# EAGLE board Powerboard (EAGLE 8.6.0)
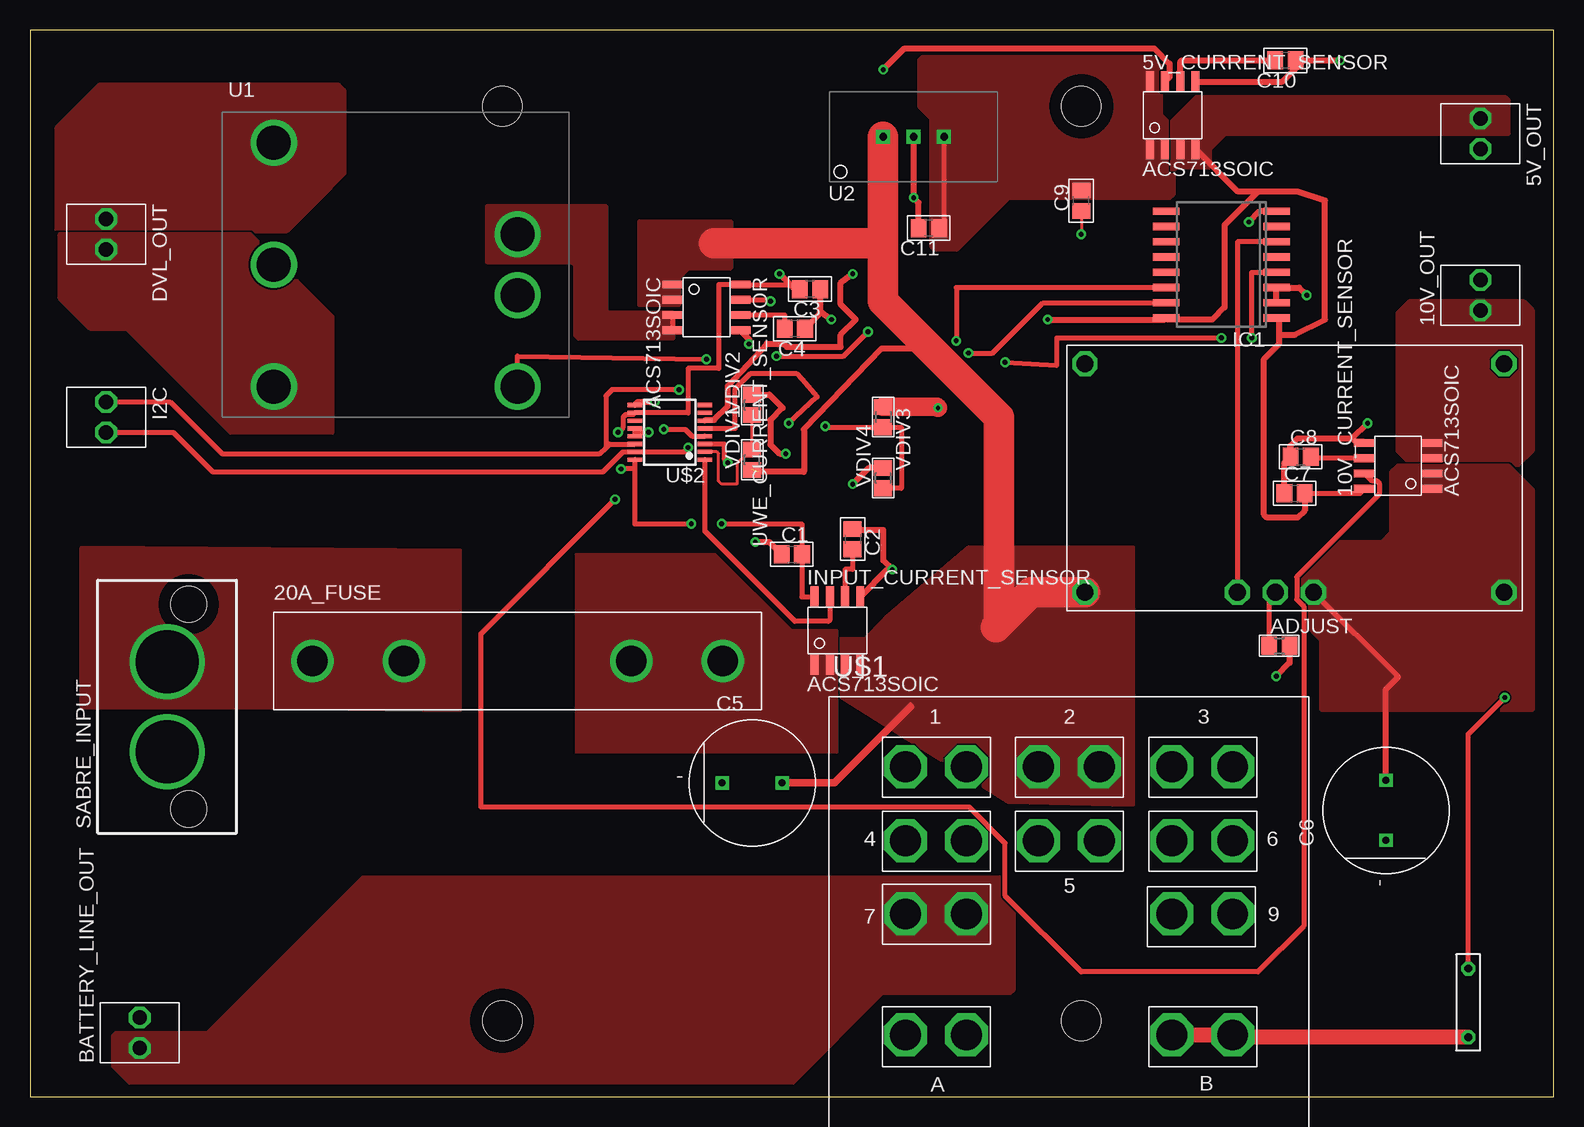
[diagram p0: board, top side]
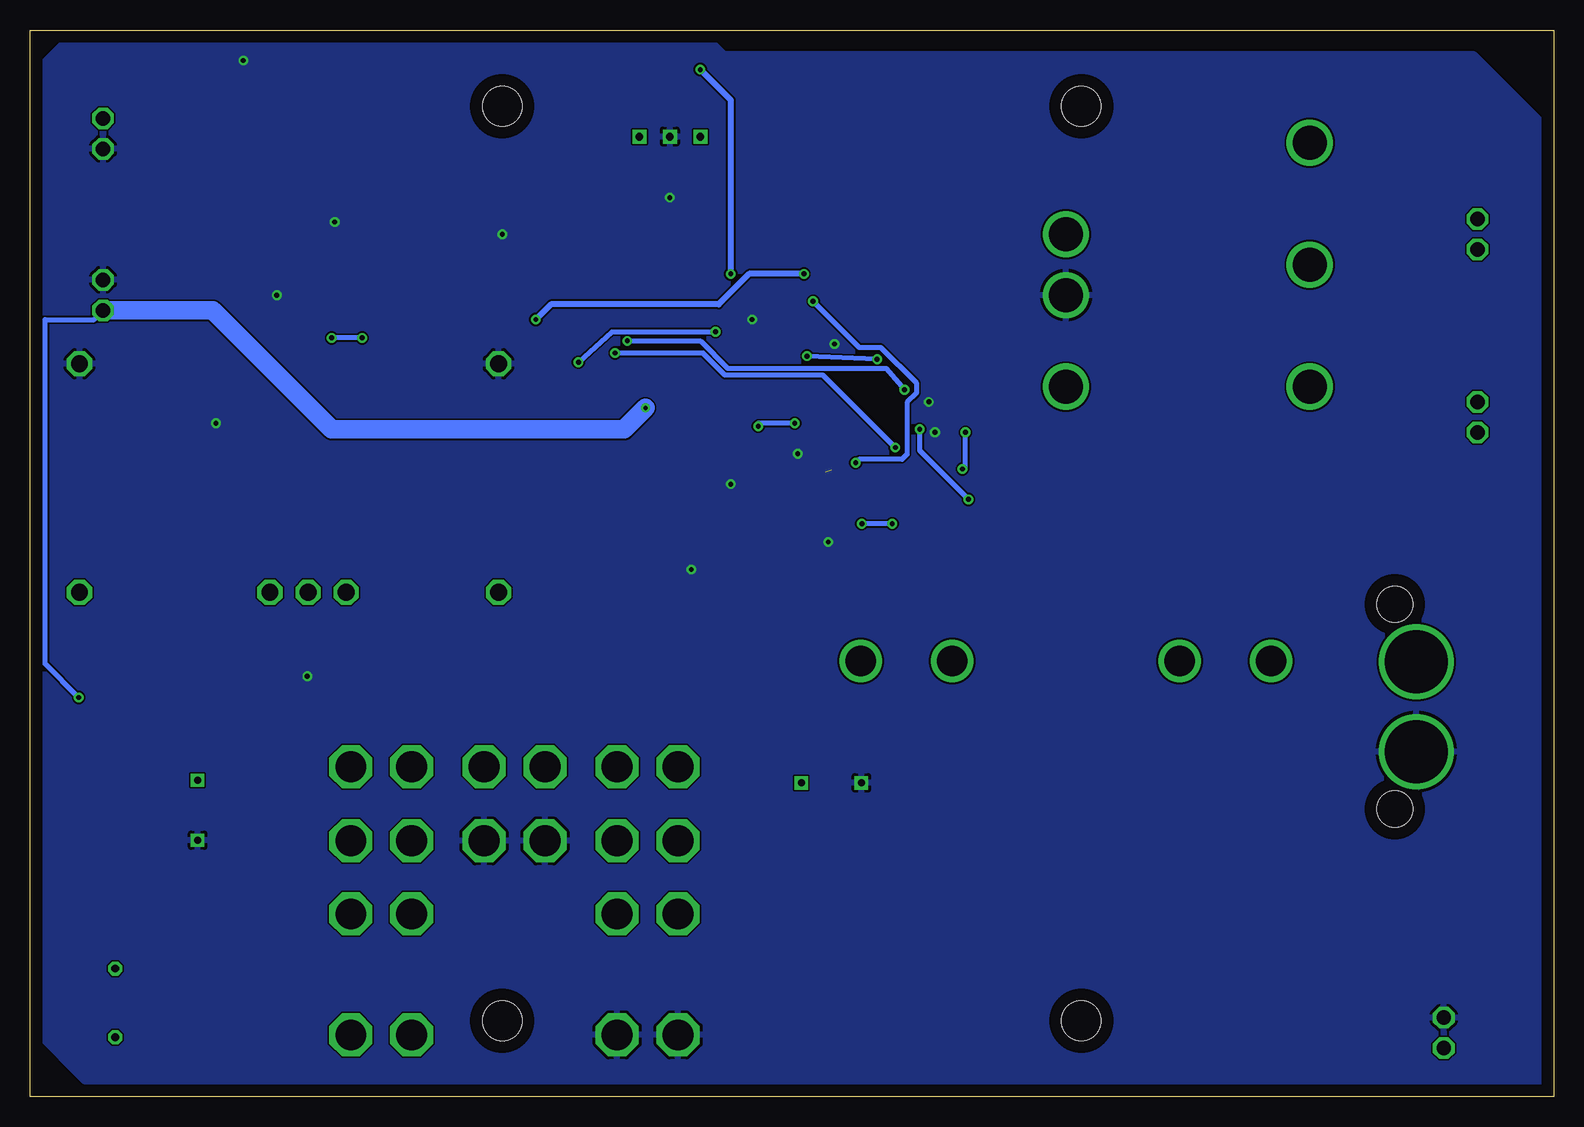
[diagram p1: board, bottom side, seen from below]

Size 127 x 88.9 mm. Coordinates in mm from the lower left corner, seen from the top.
Outline: 0,0 127,0 127,88.9 0,88.9 0,0
Copper layers (1*16): Top 0.035mm / dielectric 1.5mm / Bottom 0.035mm
Design rules "default *": minimum track width 10mil, minimum drill 15mil, track to track 6mil, track to pad 6mil, pad to pad 6mil, via to via 6mil, smd to smd 6mil, copper to edge 40mil, drill to drill 6mil, minimum pad ring 10mil, minimum via ring 8mil, stop-mask expansion 4mil, vias tented up to drill 0mil, thermal gap 10mil
Holes 3.3 mm at 39.37,82.55 87.63,82.55 39.37,6.35 87.63,6.35

## Footprints (pad centres in the part's own frame; a part is rotated, then mirrored left to right if it is on the bottom)
ACS713-SOIC = smd 0.65 x 1.75: P$1 -1.905,-2.8; P$2 -0.635,-2.8; P$3 0.635,-2.8; P$4 1.905,-2.8; P$5 1.905,2.8; P$6 0.635,2.8; P$7 -0.635,2.8; P$8 -1.905,2.8
KK254_VERT_2PIN = drill 1.2 octagon: P$1 1.27,0; P$2 -1.27,0
PTN = drill 1.397 octagon: ADJUST -1.587,-9.525; GND1 -17.462,9.525; GND2 17.462,9.525; INHIBIT -4.763,-9.525; SENSE 1.587,-9.525; VIN -17.462,-9.525; VOUT 17.462,-9.525
1.25"_FUSECLIPS = drill 2.54: P$1 -17.107,0; P$2 -9.487,0; P$3 9.487,0; P$4 17.107,0
R0805 = smd 1.3 x 1.5: 1 -0.85,0; 2 0.85,0
C0805 = smd 1.3 x 1.5: 1 -0.85,0; 2 0.85,0
PANASONIC_A_TYPE_M = drill 0.6 square: + 2.5,0; - -2.5,0
SO16W = smd 0.6 x 2.2: 1 -4.445,-4.6; 2 -3.175,-4.6; 3 -1.905,-4.6; 4 -0.635,-4.6; 5 0.635,-4.6; 6 1.905,-4.6; 7 3.175,-4.6; 8 4.445,-4.6; 9 4.445,4.6; 10 3.175,4.6; 11 1.905,4.6; 12 0.635,4.6; 13 -0.635,4.6; 14 -1.905,4.6; 15 -3.175,4.6; 16 -4.445,4.6
HE151TR-ND = drill 0.65 octagon: P$1 -2.81,0; P$2 2.905,0
SUPERSABRE_2CIRCUIT = drill 5.25: P$1 -3.747,0; P$2 3.747,0 | hole 2.997: -8.534,-1.803; 8.534,-1.803
UEI15 = drill 2.845: +VIN 10.16,2.54; +VOUT -10.16,10.16; -VIN 10.16,-2.54; -VOUT -10.16,-10.16; ON/OFFCNTRL 10.16,-10.16; OTPTTRIM -10.16,0
TSR2 = drill 0.65 square: 1 -2.54,0; 2 0,0; 3 2.54,0
KUHP_6.35MM-QUICK-CONNECT = drill 2.57 octagon: 1A -13.64,6.17; 1B -8.56,6.17; 2A -2.54,6.17; 2B 2.54,6.17; 3A 8.56,6.17; 3B 13.64,6.17; 4A -13.64,0; 4B -8.56,0; 5A -2.54,0; 5B 2.54,0; 6A 8.56,0; 6B 13.64,0; 7A -13.64,-6.1; 7B -8.56,-6.1; 9A 8.56,-6.1; 9B 13.64,-6.1; AA -13.64,-16.18; AB -8.56,-16.18; BA 8.56,-16.18; BB 13.64,-16.18
TSSOP16 = smd 0.35 x 1.2: 1 -2.275,-2.925; 2 -1.625,-2.925; 3 -0.975,-2.925; 4 -0.325,-2.925; 5 0.325,-2.925; 6 0.975,-2.925; 7 1.625,-2.925; 8 2.275,-2.925; 9 2.275,2.925; 10 1.625,2.925; 11 0.975,2.925; 12 0.325,2.925; 13 -0.325,2.925; 14 -0.975,2.925; 15 -1.625,2.925; 16 -2.275,2.925

## Placement (x,y rotation side)
5V_CURRENT_SENSOR  ACS713SOIC  [ACS713-SOIC]  95.25,81.79 0 top
5V_OUT  KK254_VERT_2PIN""  [KK254_VERT_2PIN]  120.9,80.26 270 top
10V_CURRENT_SENSOR  ACS713SOIC  [ACS713-SOIC]  114.05,52.58 90 top
10V_OUT  KK254_VERT_2PIN""  [KK254_VERT_2PIN]  120.9,66.8 90 top
10V_REGULATOR  PTN78020  [PTN]  105.41,51.56 0 top
20A_FUSE  [1.25"_FUSECLIPS]  40.64,36.32 0 top
ADJUST  2.66k  [R0805]  104.14,37.59 0 top
BATTERY_LINE_OUT  KK254_VERT_2PIN""  [KK254_VERT_2PIN]  9.14,5.33 90 top
C1  0.1u  [C0805]  63.5,45.21 0 top
C2  47n  [C0805]  68.58,46.48 270 top
C3  0.1u  [C0805]  65.02,67.31 180 top
C4  47n  [C0805]  63.75,64.01 180 top
C5  [PANASONIC_A_TYPE_M]  60.2,26.16 0 top
C6  [PANASONIC_A_TYPE_M]  113.03,23.88 90 top
C7  0.1u  [C0805]  105.41,50.29 0 top
C8  47n  [C0805]  105.92,53.34 0 top
C9  0.1u  [C0805]  87.63,74.68 90 top
C10  47n  [C0805]  104.65,86.36 180 top
C11  FILTER  [C0805]  74.93,72.39 180 top
DVL_OUT  KK254_VERT_2PIN""  [KK254_VERT_2PIN]  6.35,71.88 270 top
I2C  KK254_VERT_2PIN""  [KK254_VERT_2PIN]  6.35,56.64 270 top
IC1  PCF8574T  [SO16W]  99.31,69.34 90 top
INPUT_CURRENT_SENSOR  ACS713SOIC  [ACS713-SOIC]  67.31,38.86 0 top
MAGREAD  HE151TR-ND  [HE151TR-ND]  119.89,7.87 270 top
SABRE_INPUT  2_SUPERSABRE  [SUPERSABRE_2CIRCUIT]  11.43,32.51 90 top
U1  UEI15  [UEI15]  30.48,69.34 0 top
U2  TSR2-2450  [TSR2]  73.66,80.01 0 top
U$1  KUHP-5XX1-XX  [KUHP_6.35MM-QUICK-CONNECT]  86.61,21.34 0 top
U$2  ADS7828  [TSSOP16]  53.34,55.37 90 top
UWE_CURRENT_SENSOR  ACS713SOIC  [ACS713-SOIC]  56.39,65.79 270 top
VDIV1  90kO  [R0805]  60.2,53.09 90 top
VDIV2  10kO  [R0805]  60.2,57.66 90 top
VDIV3  90kO  [R0805]  71.12,56.64 270 top
VDIV4  10kO  [R0805]  71.12,51.56 90 top

## Library data of the parts
5V_CURRENT_SENSOR 10V_CURRENT_SENSOR INPUT_CURRENT_SENSOR UWE_CURRENT_SENSOR = allegro
5V_OUT 10V_OUT BATTERY_LINE_OUT DVL_OUT I2C SABRE_INPUT = molex
10V_REGULATOR U$2 = texas
20A_FUSE = littelfuse
ADJUST C1-C11 VDIV1-VDIV4 = resistor
IC1 = texas; MPN: PCF8574T/3,512; OC_FARNELL: 1201255; OC_NEWARK: 70R6870
MAGREAD = magReed
U1 = murata
U2 = tracoPower
U$1 = TE

## Nets
5V: 5V_CURRENT_SENSOR.P$3 5V_CURRENT_SENSOR.P$4 5V_OUT.P$2 10V_CURRENT_SENSOR.P$8 C1.2 C3.2 C7.2 IC1.1 IC1.16 INPUT_CURRENT_SENSOR.P$8 U$2.10 U$2.16 UWE_CURRENT_SENSOR.P$8
5V_CURRENT: 5V_CURRENT_SENSOR.P$7 U$2.6
10V_CURRENT: 10V_CURRENT_SENSOR.P$7 U$2.4
10V_EN: 10V_REGULATOR.INHIBIT IC1.6
10V_OUT: 10V_CURRENT_SENSOR.P$1 10V_CURRENT_SENSOR.P$2 10V_REGULATOR.SENSE 10V_REGULATOR.VOUT C6.+
10V_VOLTAGE: U$2.5 VDIV3.2 VDIV4.1
BATTERY_LINE: BATTERY_LINE_OUT.P$2 U$1.7A U$1.7B
GND: 5V_CURRENT_SENSOR.P$5 5V_OUT.P$1 10V_CURRENT_SENSOR.P$5 10V_OUT.P$1 10V_REGULATOR.GND1 10V_REGULATOR.GND2 ADJUST.2 BATTERY_LINE_OUT.P$1 C1.1 C2.1 C3.1 C4.1 C5.- C6.- C7.1 C8.1 C9.1 C10.1 C11.2 IC1.2 IC1.3 IC1.8 INPUT_CURRENT_SENSOR.P$5 SABRE_INPUT.P$1 U1.-VIN U2.2 U$1.5A U$1.5B U$1.AA U$1.AB U$2.9 U$2.12 U$2.13 UWE_CURRENT_SENSOR.P$5 VDIV2.2 VDIV4.2
INPUT_CURRENT: INPUT_CURRENT_SENSOR.P$7 U$2.1
INPUT_VOLTAGE: U$2.2 VDIV1.2 VDIV2.1
N$1: 20A_FUSE.P$3 20A_FUSE.P$4 INPUT_CURRENT_SENSOR.P$1 INPUT_CURRENT_SENSOR.P$2
N$2: C2.2 INPUT_CURRENT_SENSOR.P$6
N$3: 5V_CURRENT_SENSOR.P$6 C10.2
N$4: 5V_CURRENT_SENSOR.P$1 5V_CURRENT_SENSOR.P$2 5V_CURRENT_SENSOR.P$8 C9.2 C11.1 U2.3
N$5: 10V_REGULATOR.ADJUST ADJUST.1
N$6: U1.+VIN UWE_CURRENT_SENSOR.P$3 UWE_CURRENT_SENSOR.P$4
N$7: C4.2 UWE_CURRENT_SENSOR.P$6
N$9: MAGREAD.P$2 U$1.BA U$1.BB
N$10: 10V_CURRENT_SENSOR.P$6 C8.2
PROCESSED_10V_OUT: 10V_CURRENT_SENSOR.P$3 10V_CURRENT_SENSOR.P$4 10V_OUT.P$2 MAGREAD.P$1 VDIV3.1
PROCESSED_INPUT: 10V_REGULATOR.VIN C5.+ INPUT_CURRENT_SENSOR.P$3 INPUT_CURRENT_SENSOR.P$4 U2.1 U$1.2A U$1.2B UWE_CURRENT_SENSOR.P$1 UWE_CURRENT_SENSOR.P$2 VDIV1.1
PROCESSED_UEI_OUTPUT: DVL_OUT.P$2 U1.+VOUT
SCL: I2C.P$2 IC1.14 U$2.14
SDA: I2C.P$1 IC1.15 U$2.15
UEI_EN: IC1.4 U1.ON/OFFCNTRL
UEI_GND: DVL_OUT.P$1 U1.-VOUT
UWE_CURRENT: U$2.3 UWE_CURRENT_SENSOR.P$7
VBAT: 20A_FUSE.P$1 20A_FUSE.P$2 SABRE_INPUT.P$2

## Tracks (layer width: path | path; a pad name or v marks a point on that pad's centre or on a via)
5V  (via drill 0.4)
  Top 0.406: INPUT_CURRENT_SENSOR.P$8 64.35,41.66 C1.2 64.35,47.75 v57.66,47.75 | C3.2 64.17,67.69 UWE_CURRENT_SENSOR.P$8 57.4,67.69 57.4,60.71 54.86,60.71 54.86,57 U$2.10 50.3,56.88 49.67,56.88 49.46,56.67 49.46,55.81 v49.02,55.37 | v55.12,47.75 50.41,47.75 U$2.16 50.41,52.32 v49.28,52.32 | C7.2 110.86,50.29 10V_CURRENT_SENSOR.P$8
  Top 0.508: C7.2 106.26,48.86 105.66,48.26 103.12,48.26 102.87,48.51 102.87,61.47 104.14,62.74 104.14,63.5 | 104.14,63.5 104.14,64.67 IC1.1 | 104.14,63.5 105.41,63.5 107.95,64.77 107.95,74.68 105.66,75.44 102.36,75.44 | 102.36,75.44 99.57,72.64 99.57,65.79 98.55,64.77 94.84,64.77 IC1.16 94.59,64.77 v84.84,64.77 | 102.36,75.44 100.7,75.44 5V_CURRENT_SENSOR.P$4 | C3.2 63.75,67.31 v62.48,68.58
  Bottom 0.406: v55.12,47.75 v57.66,47.75 | v49.28,52.32 49.02,52.32 v49.02,55.37
  Bottom 0.508: v62.48,68.58 67.06,68.58 69.6,66.04 83.57,66.04 v84.84,64.77
  pour Top (no thermals): 96.52,82.55 97.28,83.31 122.94,83.31 123.19,83.06 123.19,80.26 99.57,80.26 99.06,79.76 98.3,78.99 98.3,77.47 95.5,77.47 95.25,77.22 95.25,81.28
5V_CURRENT  (via drill 0.4)
  Top 0.508: U$2.6 56.33,56.42 57.03,56.42 58.17,57.55 58.17,59.24 61.43,62.76 62.81,62.76 63.09,62.48 67.56,62.48 67.56,63.5 68.83,64.77 67.56,66.04 67.56,67.82 v68.58,68.58 | v71.12,85.6 72.9,87.38 93.73,87.38 95,86.11 95,84.97 5V_CURRENT_SENSOR.P$7
  Bottom 0.508: v68.58,68.58 68.58,83.06 v71.12,85.6
10V_CURRENT  (via drill 0.4)
  Top 0.406: v48.77,49.78 37.59,38.61 37.59,24.13 78.3,24.13 81.28,21.15 81.28,16.76 87.63,10.41 102.36,10.41 106.17,14.22 106.17,40.88 105.59,41.46 105.59,43.32 112.48,50.2 112.48,51.15 112.27,51.35 111.83,51.35 10V_CURRENT_SENSOR.P$7 | v52.83,55.63 54.61,55.63 55.19,55.05 U$2.4
  Bottom 0.406: v48.77,49.78 52.83,53.85 v52.83,55.63
10V_EN
  Top 0.406: IC1.6 100.65,71.25 10V_REGULATOR.INHIBIT
10V_OUT
  Top 0.406: 114.05,34.99 10V_REGULATOR.SENSE
  Top 0.508: C6.+ 113.03,33.97 114.05,34.99
  pour Top (no thermals): 115.06,52.58 123.19,52.58 125.22,50.55 125.22,33.27 125.22,32.77 125.22,32.26 107.7,32.26 107.7,34.29 107.7,38.1 106.17,39.62 106.17,43.18 108.71,45.72 109.22,46.23 112.78,46.23 113.54,46.99 113.54,52.07 114.05,52.58
10V_VOLTAGE  (via drill 0.4)
  Top 0.406: VDIV4.1 72.64,50.71 72.64,55.79 VDIV3.2 66.29,55.79 v66.29,55.88 | U$2.5 58.78,55.7 58.78,58.99 60.06,60.28 63.89,60.28 64.35,59.81 65.62,58.33 v63.25,56.13
  Bottom 0.406: v63.25,56.13 66.29,56.13 v66.29,55.88
BATTERY_LINE
  pour Top (no thermals): 82.04,8.89 82.04,17.78 81.79,18.03 81.53,18.29 36.32,18.29 27.69,18.29 14.73,5.33 7.11,5.33 6.86,5.08 6.86,2.54 8.38,1.02 63.5,1.02 71.12,8.64 81.79,8.64
GND  (via drill 0.4)
  Top 0.254: C9.1 v87.63,71.88
  Top 0.406: U$2.13 U$2.12 50.74,55.37 v51.56,55.37
  Top 0.508: C10.1 106.17,86.36 | 106.17,86.36 v109.22,86.36 | IC1.8 102.49,73.79 v101.6,72.9 | IC1.2 IC1.3 105.79,67.44 v106.43,66.8 | C7.1 104.56,52.83 C8.1 105.07,54.27 105.66,54.86 110.24,54.86 | 110.24,54.86 110.49,54.61 111.12,54.61 10V_CURRENT_SENSOR.P$5 | 110.24,54.86 v111.51,56.13 | ADJUST.2 104.99,36.16 v103.89,35.05 | 5V_CURRENT_SENSOR.P$5 104.4,84.59 106.17,86.36 | U2.2 v73.66,74.93 74.08,74.51 C11.2 | C3.1 65.87,65.44 | 65.87,65.44 v66.8,64.77 | C4.1 65.87,65.28 65.87,65.44 | UWE_CURRENT_SENSOR.P$5 59.94,63.12 v59.94,62.74 | VDIV2.2 61.63,58.51 62.74,57.4 61.72,56.39 61.72,54.36 62.48,53.59 v62.99,53.59 | U$2.9 50.68,57.91 v52.07,57.91 | C1.1 61.63,46.23 v60.45,46.23 | VDIV4.2 69.94,52.41 v68.58,51.05 | C2.1 68.67,47.24 71.12,47.24 71.12,44.7 v71.88,43.94 71.5,43.94 INPUT_CURRENT_SENSOR.P$5
  pour Bottom: 1.02,1.27 1.02,81.28 6.6,86.87 69.09,86.87 70.36,88.14 123.95,88.14 126.49,85.6 126.49,5.33 122.43,1.27
INPUT_CURRENT
  Top 0.406: 66.55,41.66 INPUT_CURRENT_SENSOR.P$7 66.67,39.75 66.55,39.62 63.75,39.62 56.27,47.11 U$2.1
INPUT_VOLTAGE
  Top 0.254: VDIV2.1 VDIV1.2 59.43,53.16 59.33,53.16 58.93,52.76 58.93,51.05 57.66,51.05 57.4,51.31 57.4,53.59 57.25,53.75 U$2.2
N$1
  pour Top (no thermals): 45.47,45.21 45.47,28.7 67.31,28.7 67.31,38.86 63.5,38.86 57.15,45.21
N$2
  Top 0.406: C2.2 68.58,43.94 67.94,43.94 INPUT_CURRENT_SENSOR.P$6
N$3
  Top 0.508: 5V_CURRENT_SENSOR.P$6 95.89,86.23 96.01,86.36 C10.2
N$4
  Top 0.406: U2.3 76.2,72.81 C11.1
  pour Top (rank 2, no thermals): 74.42,86.61 93.47,86.61 94.23,85.85 94.23,81.79 95.25,80.77 95.25,75.18 95,74.93 81.53,74.93 77.22,70.61 75.44,70.61 75.18,70.87 75.18,81.53 74.17,82.55 74.17,86.36
N$5
  Top 0.406: 10V_REGULATOR.ADJUST 103.29,42.04 ADJUST.1
N$6
  Top 0.406: UWE_CURRENT_SENSOR.P$4 UWE_CURRENT_SENSOR.P$3
  pour Top (no thermals): 38.1,74.17 38.1,69.6 45.21,69.6 45.47,69.34 45.47,63.5 45.72,63.25 53.59,63.25 53.59,65.28 48.01,65.28 48.01,74.17
N$7
  Top 0.406: UWE_CURRENT_SENSOR.P$6 62.9,65.15 C4.2
N$9
  Top 1.27: MAGREAD.P$2 100.44,4.97 U$1.BB U$1.BA
N$10
  Top 0.406: 10V_CURRENT_SENSOR.P$6 106.89,53.21 C8.2
PROCESSED_10V_OUT  (via drill 0.35, 0.4)
  Top 0.406: MAGREAD.P$1 119.89,30.23 v122.94,33.27
  Top 1.524: v75.69,57.4 75.6,57.49 VDIV3.1
  Bottom 0.406: v122.94,33.27 125.73,36.07 125.73,64.77 121.67,64.77 121.16,65.28
  Bottom 0.508: 10V_OUT.P$2 121.16,65.28
  Bottom 1.524: 10V_OUT.P$2 111.76,65.53 101.85,55.63 88.9,55.63 84.58,55.63 77.47,55.63 v75.69,57.4
  pour Top (rank 2, no thermals): 117.35,66.29 124.46,66.29 125.22,65.53 125.22,53.85 123.95,52.58 115.32,52.58 114.05,53.85 114.05,65.28 114.81,66.04 115.06,66.29
PROCESSED_INPUT  (1 unrouted)
  Top 0.152: C5.+ 62.74,26.16
  Top 0.305: 73.41,32.51 73.41,32.77
  Top 0.508: 75.06,62.36 70.99,62.36 64.52,55.63 64.52,52.07 60.71,52.07
  Top 0.61: C5.+ 67.06,26.16 73.41,32.51
  Top 2.54: U2.1 71.12,71.12 | 71.12,71.12 71.12,66.29 75.06,62.36 80.77,56.64 80.77,39.37 | 80.77,39.37 80.52,39.12 | 80.77,39.37 83.44,42.04 10V_REGULATOR.VIN | 71.12,71.12 57.02,71.12
  pour Top (rank 2, no thermals): 91.95,45.72 78.23,45.72 71.37,39.88 69.6,38.1 67.31,38.1 67.31,33.53 81.53,24.64 91.95,24.38
  pour Top (no thermals): 50.8,66.04 54.1,66.04 54.1,68.33 54.86,69.09 58.42,69.09 58.42,72.9 50.8,72.9
PROCESSED_UEI_OUTPUT
  pour Top (rank 2, no thermals): 26.16,83.82 26.16,76.96 23.88,74.68 21.34,72.14 2.29,72.14 2.29,80.77 5.84,84.33 25.65,84.33
SCL  (via drill 0.4)
  Top 0.406: I2C.P$2 11.68,57.91 16,53.59 47.5,53.59 48.01,54.1 | 48.01,54.1 48.3,54.4 U$2.14 | IC1.14 77.22,67.44 v77.22,62.99 | v54.1,58.93 48.51,58.93 48.01,58.42 48.01,54.1
  Bottom 0.406: v77.22,62.99 71.12,62.99 68.83,60.71 55.63,60.71 v54.1,58.93
SDA  (via drill 0.4)
  Top 0.406: I2C.P$1 11.94,55.37 15.24,52.07 47.75,52.07 49.43,53.75 U$2.15 54.51,53.75 v54.86,54.1 | v78.23,61.98 80.24,61.98 80.47,62.2 80.49,62.2 84.45,66.17 IC1.15
  Bottom 0.406: v54.86,54.1 60.91,60.15 69.06,60.15 70.89,61.98 v78.23,61.98
UEI_EN  (via drill 0.4)
  Top 0.406: U1.ON/OFFCNTRL 40.64,61.72 v56.39,61.47 | v62.23,61.72 67.82,61.72 v69.85,63.75 | v81.28,61.21 85.6,60.96 85.6,63.25 v99.31,63.25 | IC1.4 101.85,68.71 v101.85,63.25
  Bottom 0.406: v56.39,61.47 v62.23,61.72 | v99.31,63.25 v101.85,63.25 | v81.28,61.21 78.49,63.75 v69.85,63.75
UEI_GND
  pour Top (no thermals): 25.15,55.37 16.76,55.37 8.13,64.01 5.08,64.01 2.54,66.55 2.54,71.88 18.29,71.88 25.15,65.02
UWE_CURRENT  (via drill 0.4)
  Top 0.406: UWE_CURRENT_SENSOR.P$7 61.59,66.42 v61.72,66.29 | v58.17,52.83 57.91,53.09 57.91,54.36 57.87,54.4 U$2.3
  Bottom 0.406: v61.72,66.29 57.88,62.46 56.08,62.46 53.11,59.49 53.11,58.62 53.88,57.86 53.88,53.54 54.31,53.11 57.88,53.11 v58.17,52.83
VBAT
  pour Top (no thermals): 4.32,45.72 4.32,32.51 17.27,32.51 35.81,32.26 35.81,45.47